# Altium PCB PCB1.PcbDoc
Units mil, origin at the board's own origin, x right, y up, seen from the top; angles counter-clockwise.
Board outline 6000 x 4000 mil, 2 copper layers (Top Layer, Bottom Layer); 24 components, 20 nets, 104 pads, 0 vias.
Unrouted connection lines stored in the file: 61.
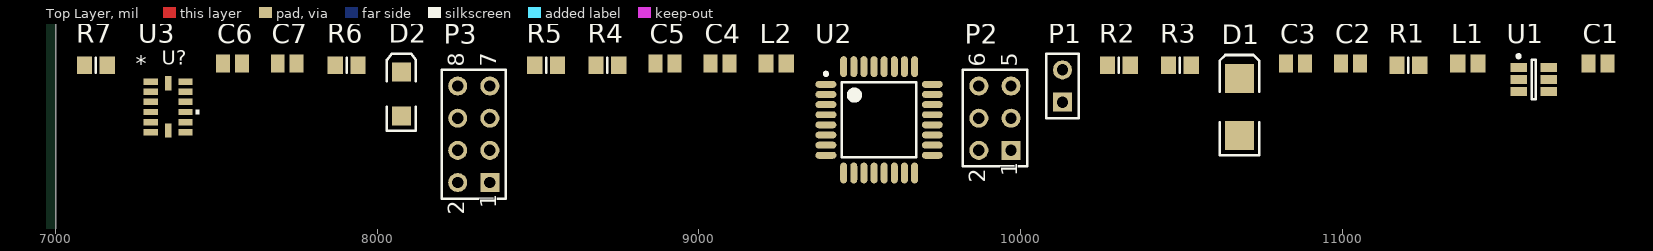
[diagram p0: Top Layer view]
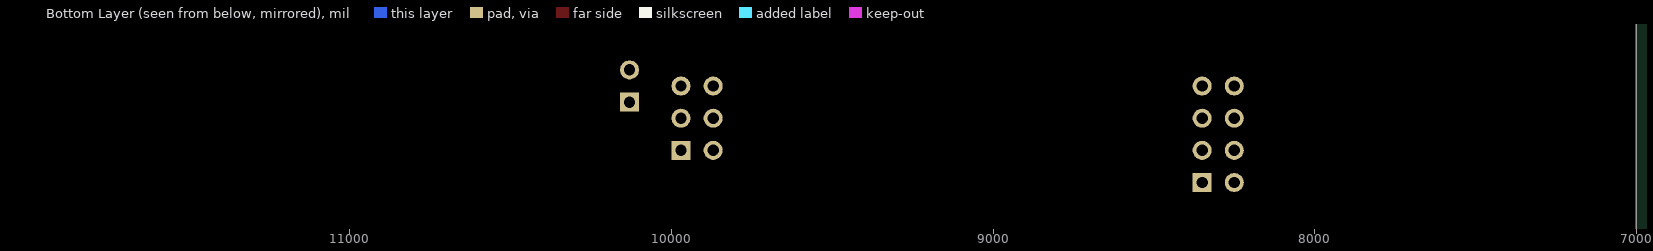
[diagram p1: Bottom Layer view, seen from below]

## Layer stack, top to bottom
Top Layer: signal copper 1.4
Dielectric: dielectric 12.6, FR-4, Dk 4.8
Bottom Layer: signal copper 1.4

## Board outline
1000,1000 7000,1000 7000,5000 1000,5000

## Design rules (kind name [scope] priority, off if disabled: settings)
Clearance [All] p1: gap=10
PolygonConnect [All] p1: connectstyle=Relief reliefconductorwidth=10 reliefentries=4 polygonreliefangle="90 Angle" airgapwidth=10
RoomDefinition Sheet1 [InComponentClass('Sheet1')] p1: confinementstyle=ConfineIn formatcopy=TRUE lockcomponents=FALSE outline 7045,1060 11860,1060 11860,1685 7045,1685
RoutingVias [All] p1: holewidth=28 width=50 viastyle="Through Hole" minholewidth=28 minwidth=50 maxholewidth=28 maxwidth=50
SolderMaskExpansion [All] p1: expansion=4
Width [All] p1: maxlimit=10 minlimit=10 preferedwidth=10
28 further rules are at their usual default settings.

## Components (designator, comment, footprint, x,y, rotation, side; value= is the part's Value field where it differs from the comment)
C1 "Cap" C0805 11795,1545 r0 top
C2 "Cap" C0805 11025,1545 r0 top
C3 "Cap" C0805 10855,1545 r0 top
C4 "Cap Pol3" C0805 9065,1545 r0 top
C5 "Cap" C0805 8895,1545 r0 top
C6 "Cap" C0805 7550,1545 r0 top
C7 "Cap" C0805 7720,1545 r0 top
D1 "D Schottky" SMB 10680,1410 r90 top
D2 "LED0" 3.2X1.6X1.1 8075,1450 r90 top
L1 "Inductor" 2029 11390,1545 r0 top
L2 "Inductor" 2029 9240,1545 r0 top
P1 "Header 2" HDR1X2 10130,1425 r90 top
P2 "ISP" HDR2X3 9970,1275 r90 top
P3 "NRF Board" HDR2X4 8350,1175 r90 top
R1 "Res1" 6-0805_N 11205,1540 r0 top
R2 "Res1" 6-0805_N 10305,1540 r0 top
R3 "Res1" 6-0805_N 10495,1540 r0 top
R4 "Res1" 6-0805_N 8715,1540 r0 top
R5 "Res1" 6-0805_N 8525,1540 r0 top
R6 "Res1" 6-0805_N 7905,1540 r0 top
R7 "Res1" 6-0805_N 7125,1540 r0 top
U1 "Buck" SOT23-6 11595,1495 r0 top
U2 "ATmega328-AU" 32A_N 9560,1370 r0 top
U3 "ADXL375BCCZ" LGA_CC-14-1 7350,1410 r0 top

## Footprints (in the part's own frame and the unit in brackets; to place one, negate y for a bottom-side part, rotate by r counter-clockwise, add the part's x,y. Pads: shape width x height; smd on the part's side, far side on the other; paste and mask are expansions set on the pad)
3.2X1.6X1.1 [mm] "SMT LED; 2 Flat Leads"
  rect 1.5x1.5 smd: 1(-1.75,0) 2(1.75,0)
  silkscreen extent -2.9,-1.15 3.2,1.15
6-0805_N [mm] "Chip Resistor, Body 2.0x1.2mm, IPC Medium Density"
  rect 1.2x1.4 smd: 1(-0.9,0) 2(0.9,0)
  silkscreen extent 0,-0.6 0,0.6, body extent -1.07,-0.7 1.07,0.7, height 0.7
32A_N [mm] "Thin QFP, 32-Leads, Body 7x7mm, Pitch 0.8mm, IPC Medium Density"
  oval 1.65x0.55 smd: 1(-4.2,2.8) 2(-4.2,2) 3(-4.2,1.2) 4(-4.2,0.4) 5(-4.2,-0.4) 6(-4.2,-1.2) 7(-4.2,-2) 8(-4.2,-2.8) 17(4.2,-2.8) 18(4.2,-2) 19(4.2,-1.2) 20(4.2,-0.4) 21(4.2,0.4) 22(4.2,1.2) 23(4.2,2) 24(4.2,2.8)
  oval 0.55x1.65 smd: 9(-2.8,-4.2) 10(-2,-4.2) 11(-1.2,-4.2) 12(-0.4,-4.2) 13(0.4,-4.2) 14(1.2,-4.2) 15(2,-4.2) 16(2.8,-4.2) 25(2.8,4.2) 26(2,4.2) 27(1.2,4.2) 28(0.4,4.2) 29(-0.4,4.2) 30(-1.2,4.2) 31(-2,4.2) 32(-2.8,4.2)
  silkscreen extent -4.32,-2.95 2.95,3.75, body extent -3.5,-3.5 3.5,3.5, height 1.2
2029 [mm] "Chip Inductor, Body 2.0x1.2mm, IPC High Density"
  rect 1.2x1.4 smd: 1(-0.8,0) 2(0.8,0)
  body extent -1.1,-0.7 1.1,0.7, height 0.55
C0805 [mm] "Chip Capacitor, Body 2.0x1.3mm, IPC High Density"
  rect 1.1x1.4 smd: 1(-0.75,0) 2(0.75,0)
  body extent -1.1,-0.72 1.1,0.72, height 1.4
HDR1X2 [mm] "Connector; Header; 2 Position"
  rect 1.5x1.5 hole 0.9: 1(0,0)
  round 1.5 hole 0.9: 2(2.54,0)
  silkscreen extent -1.27,-1.27 3.81,1.27
HDR2X3 [mm] "Connector; Header; 3x2 Position"
  rect 1.5x1.5 hole 0.9: 1(0,0)
  round 1.5 hole 0.9: 2(0,2.54) 3(2.54,0) 4(2.54,2.54) 5(5.08,0) 6(5.08,2.54)
  silkscreen extent -1.27,-1.27 6.35,3.81
HDR2X4 [mm] "Connector; Header; 4x2 Position"
  rect 1.5x1.5 hole 0.9: 1(0,0)
  round 1.5 hole 0.9: 2(0,2.54) 3(2.54,0) 4(2.54,2.54) 5(5.08,0) 6(5.08,2.54) 7(7.62,0) 8(7.62,2.54)
  silkscreen extent -1.27,-1.27 8.89,3.81
LGA_CC-14-1 [mm]
  rect 1.118x0.5 smd mask+0.025: 1(-1.371,2) 2(-1.371,1.2) 3(-1.371,0.4) 4(-1.371,-0.4) 5(-1.371,-1.2) 6(-1.371,-2) 8(1.371,-2) 9(1.371,-1.2) 10(1.371,-0.4) 11(1.371,0.4) 12(1.371,1.2) 13(1.371,2)
  rect 0.5x1.118 smd mask+0.025: 7(0,-1.871) 14(0,1.871)
  silkscreen extent 2.18,-0.59 2.44,-0.21
SMB [mm] "DO-214-AA/SMB; 2 C-Bend Leads; Body 5.3 x 3.6 mm, inc. leads (LxW)"
  rect 2.3x2.3 smd: 1(-2.25,0) 2(2.25,0)
  silkscreen extent -3.8,-1.55 4.1,1.55
SOT23-6 [mm]
  rect 1.3x0.7 smd: 1(-1.2,0.95) 2(-1.2,0) 3(-1.2,-0.95) 4(1.2,-0.95) 5(1.2,0) 6(1.2,0.95)
  silkscreen extent -1.32,-1.55 0.15,1.97, body extent -0.9,-1.55 0.9,1.55

## Part data
C1 C2 C3 C5 C6 C7: "Capacitor"
C4: "Polarized Capacitor (Surface Mount)"
D1: "Schottky Diode"
D2: "Typical INFRARED GaAs LED"
P1: "Header, 2-Pin"
P2: library part "Header 3X2", "Header, 3-Pin, Dual row"
P3: library part "Header 4X2", "Header, 4-Pin, Dual row"
R1 R2 R3 R4 R5 R6 R7: "Resistor"
U1: library part Component_1
U2: "8-bit AVR Microcontroller, 32KB Flash, 1KB EEPROM, 2KB SRAM, 32-pin TQFP, Industrial Grade (-40°C to 85°C)"
U3: library part ADXL345BCCZ, "Imported"

## Nets (pads, with @x,y where several pads share a name; then routed paths per layer and width w, separated by ;. In a path a pad name is that pad's centre, name@x,y a point inside that pad or via, vN(x,y) a via of type N, cw(c..) or ccw(c..) an arc to the next point about the centre after c; other vN are vias at no path point)
ADXL_CSN: R7.2 U2.24 U3.7
ADXL_IRQ: U2.23 U3.8
GND: C2.1 C4.2 C5.1 P1.2 P2.6 P3.1 R3.1 R6.2 U1.2 U2.3 U2.5 U2.21 U3.2 U3.4 U3.5
MISO: P2.1 P3.7 U2.16 U3.12
MOSI: P2.4 P3.6 U2.15 U3.13
NetC1_1: C1.1 D1.2 L1.1 U1.6
NetC1_2: C1.2 U1.1
NetC3_1: C3.1 D1.1
NetC5_2: C5.2 L2.2 U2.4 U2.6 U2.18
NetD2_1: D2.1 U2.13
NetD2_2: D2.2 R6.1
NetR1_1: R1.1 R3.2
NetR2_1: R2.1 U1.4
NRF_CE: P3.3 U2.27
NRF_CSN: P3.4 R5.1 U2.26
NRF_IRQ: P3.8 U2.25
RST: P2.5 R4.1 U2.29
SCK: P2.3 P3.5 U2.17 U3.14
VCC: C2.2 P1.1 R2.2 U1.5
VREG-3.3: C3.2 C4.1 C6.1 C7.1 L1.2 L2.1 P2.2 P3.2 R1.2 R4.2 R5.2 R7.1 U3.1 U3.6
pads on no net: C6.2 C7.2 U1.3 U2.1 U2.2 U2.7 U2.8 U2.9 U2.10 U2.11 U2.12 U2.14 U2.19 U2.20 U2.22 U2.28 U2.30 U2.31 U2.32 U3.3 U3.9 U3.10 U3.11

## Text inside footprints (layer, text, board x,y; h text height)
P2: Top Overlay "6" at 9890,1535 h50 r90; Top Overlay "5" at 9990,1535 h50 r90; Top Overlay "2" at 9890,1175 h50 r90; Top Overlay "1" at 9990,1195 h50 r90
P3: Top Overlay "2" at 8270,1075 h50 r90; Top Overlay "1" at 8370,1095 h50 r90; Top Overlay "7" at 8370,1535 h50 r90; Top Overlay "8" at 8270,1535 h50 r90
U3: Top Overlay "*" at 7249.02,1519.49 h50; Top Overlay "U?" at 7330,1525 h75.69